# Altium PCB USB Isolator Board.PcbDoc
Units mm, origin at the board's own origin, x right, y up, seen from the top; angles counter-clockwise.
Board outline 49.5 x 27.5 mm, 2 copper layers (Top Layer, Bottom Layer), stack 0.872 mm thick; 32 components, 18 nets, 92 pads, 53 vias.
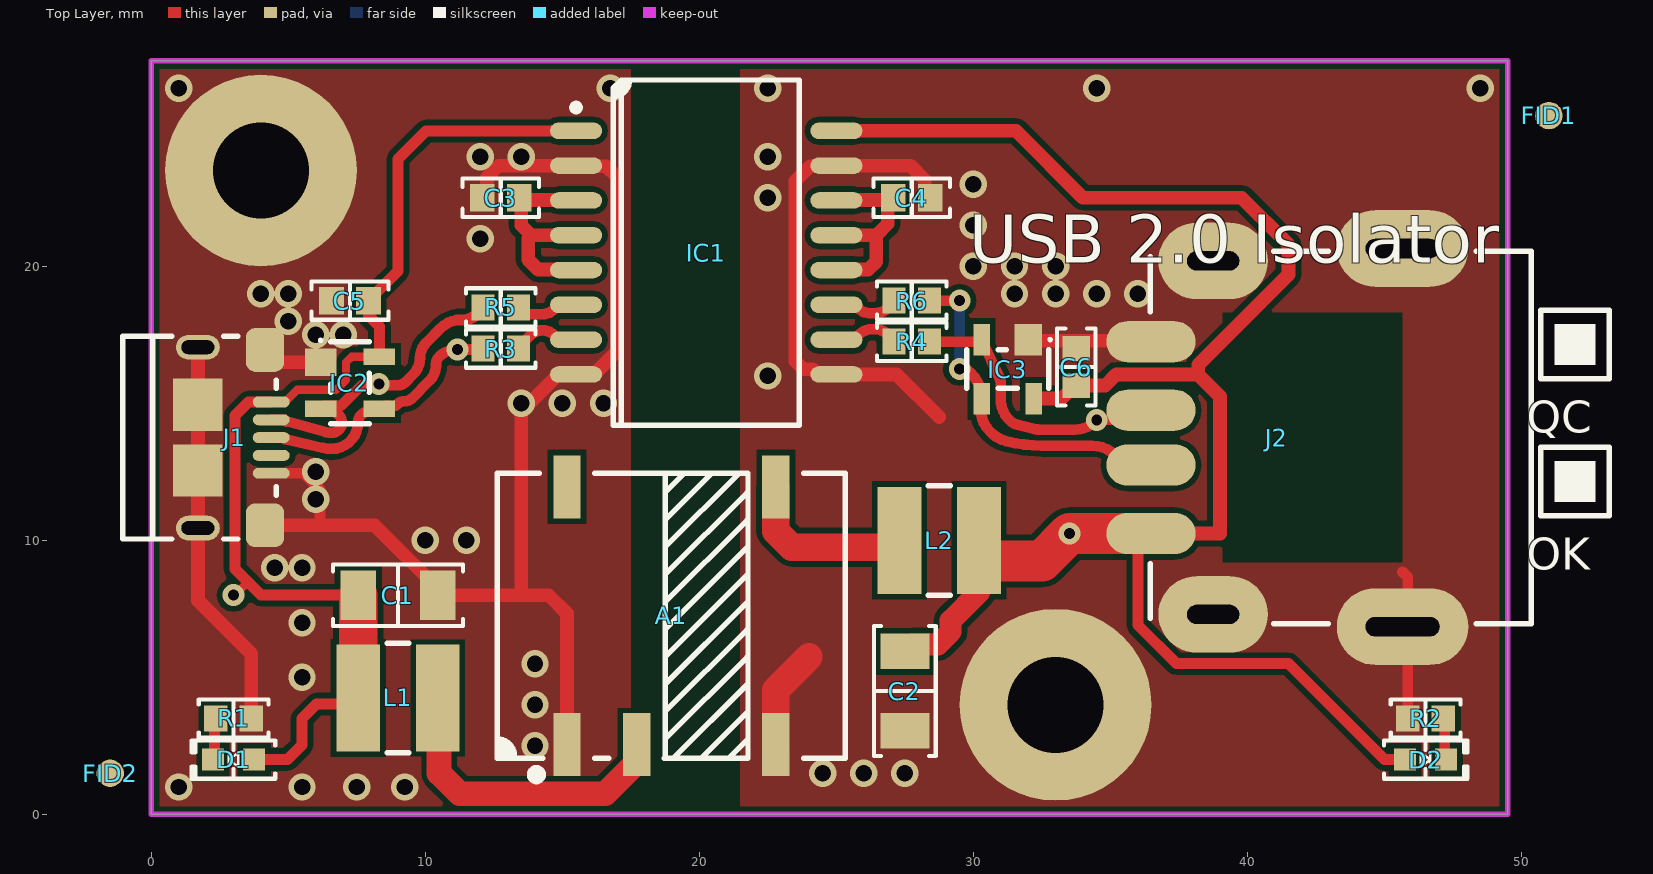
[diagram p0: Top Layer view]
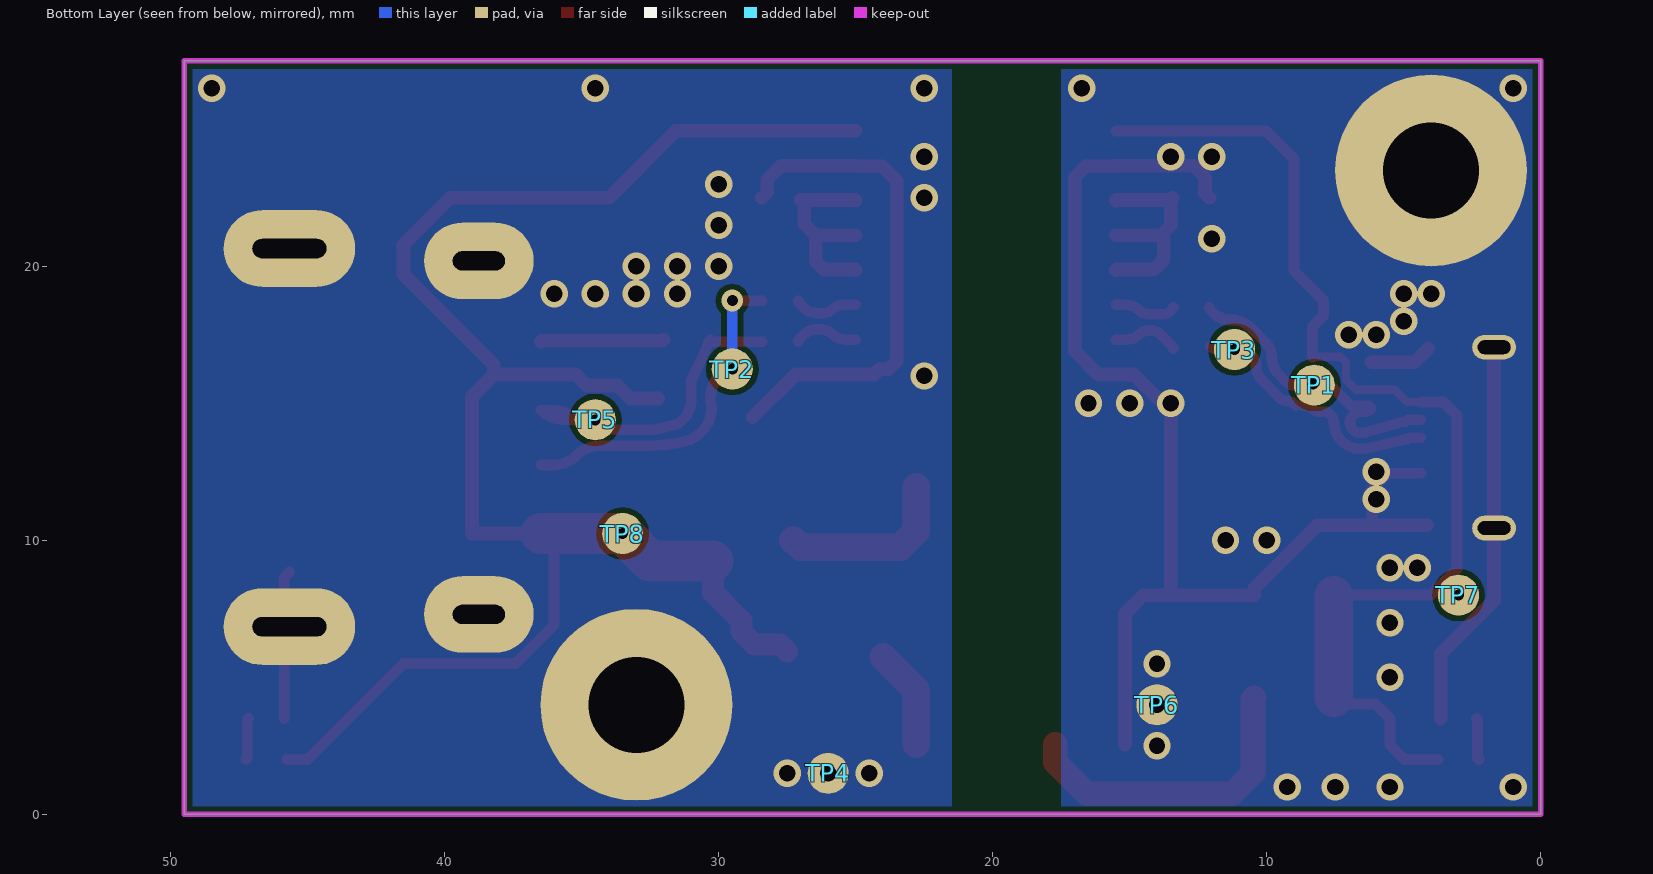
[diagram p1: Bottom Layer view, seen from below]
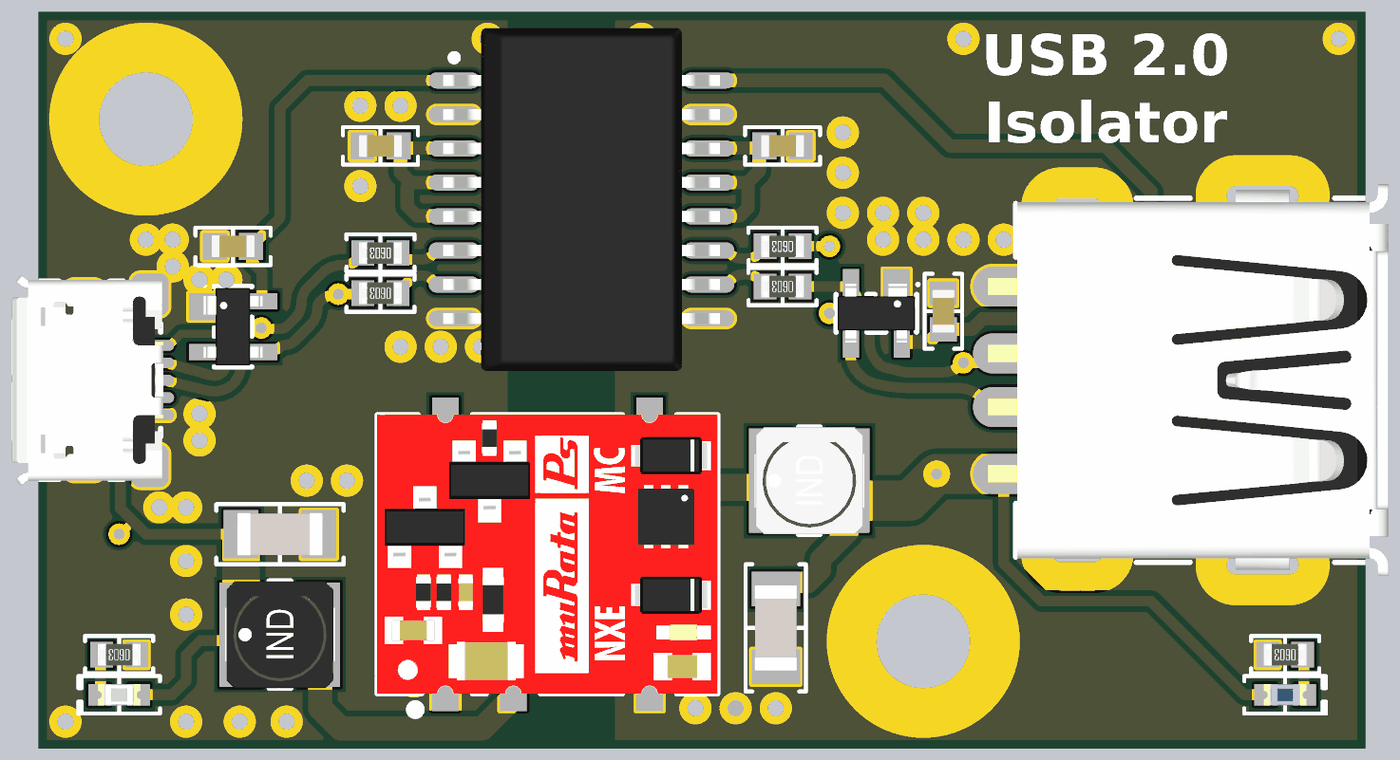
[diagram p2: 3D render of the assembled board from above, using the file's embedded part models]

## Layer stack, top to bottom
Top Solder: solder mask 0.01, Solder Resist, Dk 3.5
Top Layer: signal copper 0.036
Dielectric1: core 0.8, FR-4, Dk 4.8
Bottom Layer: signal copper 0.036
Bottom Solder: solder mask 0.01, Solder Resist, Dk 3.5

## Board outline
0,0 0,27.5 49.5,27.5 49.5,0

## Design rules (kind name [scope] priority, off if disabled: settings)
Clearance [InNet('GND1') vs InNet('GND2')] p1: gap=2.5 ignorepadtopadclearanceinfootprint=FALSE
Clearance Clearance_1 [All] p2: gap=0.2 ignorepadtopadclearanceinfootprint=FALSE
Clearance PadClearance [IsPad vs IsPad] p3: gap=0.2 ignorepadtopadclearanceinfootprint=FALSE except(0: Arc-Hole Track-Hole SMDPad-Hole THPad-Hole Via-Hole Fill-Hole Poly-Hole Region-Hole Text-Hole)
Creepage [InNet('GND1') vs InNet('GND2')] p1: checkdistance=2.5
DiffPairsRouting [InDifferentialPairClass('All Differential Pairs')] p1: maxlimit=0.3 minlimit=0.2 mostfreqgap=0.2 toplayer_minwidth=0.386 toplayer_maxwidth=0.599 toplayer_prefwidth=0.599 bottomlayer_minwidth=0.386 bottomlayer_maxwidth=0.599 bottomlayer_prefwidth=0.599 impedanceprofiledriven=TRUE impedanceprofileid={BF3D01C9-B830-4F7D-A954-FE7BFAC39876} impedanceprofilevalue=90.000000 maxuncoupledlength=12.7
HoleSize [All] p1: absolutevalues=TRUE maxlimit=6 minlimit=0.4 maxpercent=80.000 minpercent=20.000
HoleToHoleClearance [All] p1: gap=0.2 allowstackedmicrovias=TRUE
MinimumSolderMaskSliver [All] p1: minsoldermaskwidth=0
PolygonConnect ViaConnect [IsVia] p1: connectstyle=Direct reliefconductorwidth=0.254 reliefentries=4 polygonreliefangle="90 Angle" airgapwidth=0.254
PolygonConnect [All] p2: connectstyle=Direct reliefconductorwidth=0.3 reliefentries=4 polygonreliefangle="90 Angle" airgapwidth=0.254
RoutingVias [All] p1: holewidth=0.6 width=1 viastyle="Through Hole" minholewidth=0.4 minwidth=0.8 maxholewidth=5 maxwidth=6
SilkToSilkClearance [All] p1: silktosilkclearance=0
SilkToSolderMaskClearance SilkscreenOverComponentPads [IsPad] p1: minsilkscreentomaskgap=0.05 clearancetoexposedcopper=TRUE
SolderMaskExpansion "Via Tenting" [IsVia] p1: expansion=-2 istentingtop=FALSE
SolderMaskExpansion [All] p2: expansion=0.102 istentingtop=FALSE
Width [All] p1: maxlimit=2 minlimit=0.2 preferedwidth=0.4
24 further rules are at their usual default settings.

## Classes and differential pairs
differential pair DOUT: +DOUT_P -DOUT_N
differential pair DOT: +DOT_P -DOT_N
differential pair DIT: +DIT_P -DIT_N
differential pair DIN: +DIN_P -DIN_N

## Components (designator, comment, footprint, x,y, rotation, side; value= is the part's Value field where it differs from the comment)
A1 "NXE2S0505MC-R7" "MURATA NXE" 20.25,7.25 r0 top
C1 "4.7µF" "CAP 1206_3216 - 1.8MM" 9,8 r0 top
C2 "10µF" "CAP 1206_3216 - 1.8MM" 27.5,4.5 r270 top
C3 "0.1µF" "CAP 0603_1608" 12.75,22.5 r0 top
C4 "0.1µF" "CAP 0603_1608" 27.75,22.5 r180 top
C5 "1µF" "CAP 0603_1608" 7.25,18.75 r180 top
C6 "1µF" "CAP 0603_1608" 33.75,16.325 r90 top
D1 "Green" "LED 0603_1608 GREEN" 3,2 r180 top
D2 "Blue" "LED 0603_1608 BLUE" 46.5,2 r0 top
FID1 "Fiducial" Fiducial-1mm 51,25.5 r90 top
FID2 "Fiducial" Fiducial-1mm -1.5,1.5 r90 top
IC1 "ADUM4160BRIZ-RL" "ANALOG DEV SOIC-16 RI-16-1" 20.25,20.5 r0 top
IC2 "PRTR5V0U2X,215" SOT143B 7.25,15.75 r0 top
IC3 "PRTR5V0U2X,215" SOT143B 31.25,16.25 r270 top
J1 "10118193-0001LF" "FCI USB 10118193-0001LF" 1.75,13.75 r90 top
J2 "1932638-3" "TE 1932638-3 USB2.0A" 38.75,13.75 r90 top
L1 "15µH" "TDK VLCF4028-2" 9,4.25 r0 top
L2 "22µH" "TDK VLCF4024-2" 28.75,10 r0 top
R1 "680 Ohms" "RES 0603_1608" 3,3.5 r180 top
R2 "390 Ohms" "RES 0603_1608" 46.5,3.5 r180 top
R3 "24 Ohms" "RES 0603_1608" 12.75,17 r180 top
R4 "24 Ohms" "RES 0603_1608" 27.75,17.25 r180 top
R5 "24 Ohms" "RES 0603_1608" 12.75,18.5 r180 top
R6 "24 Ohms" "RES 0603_1608" 27.75,18.75 r180 top
TP1 "Test Point" TestPoint-1.5mm 8.26,15.664 r0 bottom
TP2 "Test Point" TestPoint-1.5mm 29.5,16.25 r270 bottom
TP3 "Test Point" TestPoint-1.5mm 11.176,16.965 r270 bottom
TP4 "Test Point" TestPoint-1.5mm 26,1.5 r270 bottom
TP5 "Test Point" TestPoint-1.5mm 34.5,14.4 r270 bottom
TP6 "Test Point" TestPoint-1.5mm 14,4 r270 bottom
TP7 "Test Point" TestPoint-1.5mm 3,8 r270 bottom
TP8 "Test Point" TestPoint-1.5mm 33.5,10.25 r270 bottom

## Footprints (in the part's own frame and the unit in brackets; to place one, negate y for a bottom-side part, rotate by r counter-clockwise, add the part's x,y. Pads: shape width x height; smd on the part's side, far side on the other; paste and mask are expansions set on the pad)
"ANALOG DEV SOIC-16 RI-16-1" [mm] "SOIC, 16-Leads, Body 12.80x7.50mm, Pitch 1.27mm, IPC Medium Density"
  oval 1.9x0.6 smd: 1(-4.75,4.445) 2(-4.75,3.175) 3(-4.75,1.905) 4(-4.75,0.635) 5(-4.75,-0.635) 6(-4.75,-1.905) 7(-4.75,-3.175) 8(-4.75,-4.445) 9(4.75,-4.445) 10(4.75,-3.175) 11(4.75,-1.905) 12(4.75,-0.635) 13(4.75,0.635) 14(4.75,1.905) 15(4.75,3.175) 16(4.75,4.445)
  silkscreen extent -4.87,-6.3 3.4,6.3, body extent -5.16,-6.4 5.16,6.4, height 2.65
"CAP 0603_1608" [mm] "Chip Capacitor, 2-Leads, Body 1.60x0.80mm, IPC Medium Density"
  rect 0.9x1 smd: 1(-0.675,0) 2(0.675,0)
  silkscreen extent -1.4,-0.7 1.4,0.7, body extent -0.8,-0.41 0.8,0.41, height 0.82
"CAP 1206_3216 - 1.8MM" [mm] "Chip Capacitor, 2-Leads, Body 3.25x1.60mm, IPC Medium Density"
  rect 1.3x1.8 smd: 1(-1.45,0) 2(1.45,0)
  silkscreen extent -2.37,-1.12 2.37,1.12, body extent -1.6,-0.8 1.6,0.8, height 1.8
"FCI USB 10118193-0001LF" [mm] "USB 2.0 Type B Micro"
  oval 0.4x1.35 smd: 1(1.3,-2.625) 2(0.65,-2.625) 3(0,-2.625) 4(-0.65,-2.625) 5(-1.3,-2.625)
  oval 0.9x1.6 hole 0.5 slot 1.2 at 90 deg: S(-3.3,0.05) S(3.3,0.05)
  rrect50% 1.6x1.4 smd: S(-3.2,-2.4) S(3.2,-2.4)
  rect 1.9x1.8 smd: S(-1.2,0.05) S(1.2,0.05)
  silkscreen extent -3.7,-2.8 3.7,2.8, body extent -3.93,-2.9 3.93,2.76, height 2.78
Fiducial-1mm [mm]
  round 1 smd paste-1 mask+0.5: F(0,0)
  Top Layer pour cut-out: -1,0 -0.924,0.383 -0.707,0.707 -0.383,0.924 0,1 0,1 0.383,0.924 0.707,0.707 0.924,0.383 1,0 1,0 0.924,-0.383 0.707,-0.707 0.383,-0.924 0,-1 0,-1 -0.383,-0.924 -0.707,-0.707 -0.924,-0.383 -1,0
  Top Layer pour cut-out: 0,0
"LED 0603_1608 BLUE" [mm] "Chip Diode, 2-Leads, Body 1.60x0.80mm, IPC Medium Density"
  rect 0.8x0.8 smd: 1(-0.75,0) 2(0.75,0)
  silkscreen extent -1.52,-0.7 1.52,0.7, body extent -0.8,-0.4 0.8,0.4, height 0.53
"LED 0603_1608 GREEN" [mm] "Chip Diode, 2-Leads, Body 1.60x0.80mm, IPC Medium Density"
  rect 0.8x0.8 smd: 1(-0.75,0) 2(0.75,0)
  silkscreen extent -1.52,-0.7 1.52,0.7, body extent -0.8,-0.4 0.8,0.4, height 0.53
"MURATA NXE" [mm]
  rect 1x2.3 smd: 1(-5.08,-4.7) 3(-2.54,-4.7) 7(2.54,-4.7) 8(2.54,4.7) 14(-5.08,4.7)
  silkscreen extent -7.62,-5.9 5.08,5.21, body extent -7.62,-5.21 5.08,5.21, height 4.48
"RES 0603_1608" [mm] "Chip Resistor, 2-Leads, Body 1.60x0.80mm, IPC Medium Density"
  rect 0.85x0.95 smd: 1(-0.65,0) 2(0.65,0)
  silkscreen extent -1.27,-0.7 1.27,0.7, body extent -0.8,-0.4 0.8,0.4, height 0.45
SOT143B [mm] "SOT143, 4-Leads, Body 2.90x2.30mm, Pitch 1.90mm, IPC Medium Density"
  rect 1.15x1 smd: 1(-1.075,0.75)
  rect 1.15x0.6 smd: 2(-1.075,-0.95) 3(1.075,-0.95) 4(1.075,0.95)
  silkscreen extent -1.12,-1.5 0.7,1.6, body extent -1.1,-1.45 1.1,1.45, height 1
"TDK VLCF4024-2" [mm] "Precision Wire Wound Inductor, 2-Leads, Body 4.00x4.00mm, IPC Medium Density"
  rect 1.6x3.9 smd: 1(-1.45,0) 2(1.45,0)
  silkscreen extent -0.4,-2 0.4,2, body extent -2.05,-2 2.05,2, height 2.4
"TDK VLCF4028-2" [mm] "Precision Wire Wound Inductor, 2-Leads, Body 4.00x4.00mm, IPC Medium Density"
  rect 1.6x3.9 smd: 1(-1.45,0) 2(1.45,0)
  silkscreen extent -0.4,-2 0.4,2, body extent -2.05,-2 2.05,2, height 2.81
"TE 1932638-3 USB2.0A" [mm] "USB 2.0 Type A RCP 4 POS Solder RA SMD 4 Terminal 1 Port T/R"
  oval 1.5x3.25 smd: 1(-3.5,2.27) 2(-1,2.27) 3(1,2.27) 4(3.5,2.27)
  oval 2.8x4.8 hole 0.7 slot 2.7 at 90 deg: S(-6.9,-6.91) S(6.9,-6.91)
  oval 2.8x4 hole 0.7 slot 1.9 at 90 deg: S(-6.45,0) S(6.45,0)
  Top Layer pour cut-out: -4.55,-0.35 -4.55,-6.9 4.55,-6.9 4.55,-0.35
  silkscreen extent -6.8,-11.6 6.8,2.3, body extent -7.32,-11.6 7.32,3.34, height 7.64
TestPoint-1.5mm [mm]
  round 1.5 smd: 1(0,0)

## Part data
A1: "DC DC CONVERTER 5V 2W", Current - Output (Max)=400mA, Device Package="14-SMD Module, 5 Leads", Manufacturer="Murata Power Solutions Inc.", Operating Temperature="-40°C ~ 85°C", Power (Watts)=2W, Supplier Part Number 1=811-3182-2-ND, Voltage - Input (Max)=5.5V, Voltage - Input (Min)=4.5V, Voltage - Isolation=3kV, Voltage - Output 1=5V, Applications="ITE (Commercial)", ComponentLink1Description=Datasheet, ComponentLink1URL=https://power.murata.com/data/power/ncl/kdc_nxe2.pdf, ComponentLink2Description="DigiKey Link", ComponentLink2URL=//digikey.com/product-detail/en/murata-power-solutions-inc/NXE2S0505MC-R7/811-3182-2-ND/6009739, Efficiency=72%, Features=SCP, LastUpdated="04/12/2019 23:42:39", Lifecycle Status=0, Minimum Order=1, Mounting Type="Surface Mount", Number of Outputs=1, Package / Case="14-SMD Module, 5 Leads", Packaging=TapeAndReel, Part Number=NXE2S0505MC-R7, Part Status=Active, PartId=2, Price=3.83, Series="NXE2 (2W)", Size / Dimension="0.50\" L x 0.40\" W x 0.17\" H (12.7mm x 10.4mm x 4.4mm)", Supplier 1=DigiKey, Type="Isolated Module"
C1: library part CL31B475KOHNNNE, "CAP CER 4.7UF 16V X7R 1206", Device Package="1206 (3216 Metric)", Manufacturer="Samsung Electro-Mechanics", Operating Temperature="-55°C ~ 125°C", Supplier Part Number 1=1276-3182-2-ND, Temperature Coefficient=X7R, Tolerance=±10%, Voltage - Rated=16V, Applications="General Purpose", Capacitance=4.7µF, ComponentLink1Description=Datasheet, ComponentLink1URL=http://www.samsungsem.com/kr/support/product-search/mlcc/CL31B475KOHNNNE.jsp, ComponentLink2Description="DigiKey Link", ComponentLink2URL=//digikey.com/product-detail/en/samsung-electro-mechanics/CL31B475KOHNNNE/1276-3182-2-ND/3888840, LastUpdated="29/11/2019 21:36:24", Lifecycle Status=0, Minimum Order=1, Mounting Type="Surface Mount, MLCC", Package / Case="1206 (3216 Metric)", Packaging=TapeAndReel, Part Number=CL31B475KOHNNNE, Part Status=Active, PartId=22712, Price=0.05, Series=CL, Size / Dimension="0.126\" L x 0.063\" W (3.20mm x 1.60mm)", Supplier 1=DigiKey, Thickness (Max)="0.071\" (1.80mm)"
C2: library part CL31B106MOHNNNE, "CAP CER 10UF 16V X7R 1206", Device Package="1206 (3216 Metric)", Manufacturer="Samsung Electro-Mechanics", Operating Temperature="-55°C ~ 125°C", Supplier Part Number 1=1276-6641-2-ND, Temperature Coefficient=X7R, Tolerance=±20%, Voltage - Rated=16V, Applications="General Purpose", Capacitance=10µF, ComponentLink1Description=Datasheet, ComponentLink1URL=http://www.samsungsem.com/kr/support/product-search/mlcc/CL31B106MOHNNNE.jsp, ComponentLink2Description="DigiKey Link", ComponentLink2URL=//digikey.com/product-detail/en/samsung-electro-mechanics/CL31B106MOHNNNE/1276-6641-2-ND/5961125, LastUpdated="29/11/2019 21:36:18", Lifecycle Status=0, Minimum Order=1, Mounting Type="Surface Mount, MLCC", Package / Case="1206 (3216 Metric)", Packaging=TapeAndReel, Part Number=CL31B106MOHNNNE, Part Status=Active, PartId=21983, Price=0.04, Series=CL, Size / Dimension="0.126\" L x 0.063\" W (3.20mm x 1.60mm)", Supplier 1=DigiKey, Thickness (Max)="0.071\" (1.80mm)"
C3 C4: library part CL10B104KB8NNNL, "CAP CER 0.1UF 50V X7R 0603", Device Package="0603 (1608 Metric)", Manufacturer="Samsung Electro-Mechanics", Operating Temperature="-55°C ~ 125°C", Supplier Part Number 1=1276-CL10B104KB8NNNLTR-ND, Temperature Coefficient=X7R, Tolerance=±10%, Voltage - Rated=50V, Applications="General Purpose", Capacitance=0.1µF, ComponentLink1Description=Datasheet, ComponentLink1URL=http://www.samsungsem.com/kr/support/product-search/mlcc/CL10B104KB8NNNL.jsp, ComponentLink2Description="DigiKey Link", ComponentLink2URL=//digikey.com/product-detail/en/samsung-electro-mechanics/CL10B104KB8NNNL/1276-CL10B104KB8NNNLTR-ND/3894274, LastUpdated="29/11/2019 20:59:46", Lifecycle Status=0, Minimum Order=1, Mounting Type="Surface Mount, MLCC", Package / Case="0603 (1608 Metric)", Packaging=TapeAndReel, Part Number=CL10B104KB8NNNL, Part Status=Active, PartId=3517, Price=0.00, Series=CL, Size / Dimension="0.063\" L x 0.031\" W (1.60mm x 0.80mm)", Supplier 1=DigiKey, Thickness (Max)="0.035\" (0.90mm)"
C5 C6: library part CC0603KRX5R8BB105, "CAP CER 1UF 25V X5R 0603", Device Package="0603 (1608 Metric)", Manufacturer=Yageo, Operating Temperature="-55°C ~ 85°C", Supplier Part Number 1=311-1445-2-ND, Temperature Coefficient=X5R, Tolerance=±10%, Voltage - Rated=25V, Applications="General Purpose", Capacitance=1µF, ComponentLink1Description=Datasheet, ComponentLink1URL=https://www.yageo.com/upload/media/product/productsearch/datasheet/mlcc/UPY-GPHC_X5R_4V-to-50V_25.pdf, ComponentLink2Description="DigiKey Link", ComponentLink2URL=//digikey.com/product-detail/en/yageo/CC0603KRX5R8BB105/311-1445-2-ND/2833610, LastUpdated="29/11/2019 20:59:49", Lifecycle Status=0, Minimum Order=1, Mounting Type="Surface Mount, MLCC", Package / Case="0603 (1608 Metric)", Packaging=TapeAndReel, Part Number=CC0603KRX5R8BB105, Part Status=Active, PartId=5146, Price=0.01, Series=CC, Size / Dimension="0.063\" L x 0.031\" W (1.60mm x 0.80mm)", Supplier 1=DigiKey, Thickness (Max)="0.035\" (0.90mm)"
D1: library part LTST-C191KGKT, "LED GREEN CLEAR SMD", Current - Test=20mA, Device Package="0603 (1608 Metric)", Lens Color=Colorless, Manufacturer="Lite-On Inc.", Millicandela Rating=35mcd, Supplier Part Number 1=160-1446-2-ND, Voltage - Forward (Vf) (Typ)=2V, Color=Green, ComponentLink1Description=Datasheet, ComponentLink1URL=http://optoelectronics.liteon.com/upload/download/DS22-2000-228/LTST-C191KGKT.PDF, ComponentLink2Description="DigiKey Link", ComponentLink2URL=//digikey.com/product-detail/en/lite-on-inc/LTST-C191KGKT/160-1446-2-ND/386835, Configuration=Standard, Height (Max)=0.65mm, LastUpdated="01/12/2019 14:50:11", Lens Size="1.10mm x 0.80mm", Lens Style="Rectangle with Flat Top", Lens Transparency=Clear, Lifecycle Status=0, Minimum Order=1, Mounting Type="Surface Mount", Package / Case="0603 (1608 Metric)", Packaging=TapeAndReel, Part Number=LTST-C191KGKT, Part Status=Active, PartId=655, Price=0.04, Series=-, Size / Dimension="1.60mm L x 0.80mm W", Supplier 1=DigiKey, Viewing Angle=130°, Wavelength - Dominant=571nm, Wavelength - Peak=574nm
D2: library part LTST-C194TBKT, "LED BLUE CLEAR SMD", Current - Test=20mA, Device Package="0603 (1608 Metric)", Lens Color=Colorless, Manufacturer="Lite-On Inc.", Millicandela Rating=104mcd, Supplier Part Number 1=160-1837-2-ND, Voltage - Forward (Vf) (Typ)=3.3V, Color=Blue, ComponentLink1Description=Datasheet, ComponentLink1URL=http://optoelectronics.liteon.com/upload/download/DS22-2010-0025/LTST-C194TBKT.PDF, ComponentLink2Description="DigiKey Link", ComponentLink2URL=//digikey.com/product-detail/en/lite-on-inc/LTST-C194TBKT/160-1837-2-ND/2356225, Configuration=Standard, Height (Max)=0.45mm, LastUpdated="01/12/2019 14:50:37", Lens Size="1.15mm x 0.80mm", Lens Style="Rectangle with Flat Top", Lens Transparency=Clear, Lifecycle Status=0, Minimum Order=1, Mounting Type="Surface Mount", Package / Case="0603 (1608 Metric)", Packaging=TapeAndReel, Part Number=LTST-C194TBKT, Part Status=Active, PartId=828, Price=0.06, Series=-, Size / Dimension="1.60mm L x 0.80mm W", Supplier 1=DigiKey, Viewing Angle=130°, Wavelength - Dominant=468nm, Wavelength - Peak=468nm
IC1: "DGTL ISOLATOR 5KV 2CH USB 16SOIC", Device Package="16-SOIC (0.295\", 7.50mm Width)", Isolated Power=No, Manufacturer="Analog Devices Inc.", Operating Temperature="-40°C ~ 105°C", Supplier Device Package=16-SOIC-IC, Supplier Part Number 1=ADUM4160BRIZ-RLTR-ND, Voltage - Isolation=5000Vrms, Voltage - Supply="3.1V ~ 5.5V", Channel Type=Bidirectional, Common Mode Transient Immunity (Min)=25kV/µs, ComponentLink1Description=Datasheet, ComponentLink1URL=https://www.analog.com/media/en/technical-documentation/data-sheets/ADuM4160.pdf, ComponentLink2Description="DigiKey Link", ComponentLink2URL=//digikey.com/product-detail/en/analog-devices-inc/ADUM4160BRIZ-RL/ADUM4160BRIZ-RLTR-ND/2700137, Data Rate=12Mbps, Inputs - Side 1/Side 2=2/2, LastUpdated="09/12/2019 20:48:06", Lifecycle Status=0, Minimum Order=1, Mounting Type="Surface Mount", Number of Channels=2, Package / Case="16-SOIC (0.295\", 7.50mm Width)", Packaging=TapeAndReel, Part Number=ADUM4160BRIZ-RL, Part Status=Active, PartId=48, Price=6.80, Propagation Delay tpLH / tpHL (Max)="70ns, 70ns", Rise / Fall Time (Typ)="20ns, 20ns (Max)", Series=iCoupler®, Supplier 1=DigiKey, Technology="Magnetic Coupling", Type=USB
IC2 IC3: "TVS DIODE 5.5V SOT143B", Capacitance @ Frequency="1pF @ 1MHz", Device Package="TO-253-4, TO-253AA", Manufacturer="Nexperia USA Inc.", Operating Temperature="-40°C ~ 85°C (TA)", Power Line Protection=Yes, Supplier Device Package=SOT-143B, Supplier Part Number 1=1727-3884-2-ND, Voltage - Breakdown (Min)=6V, Voltage - Reverse Standoff (Typ)="5.5V (Max)", Applications="General Purpose", ComponentLink1Description=Datasheet, ComponentLink1URL=https://assets.nexperia.com/documents/data-sheet/PRTR5V0U2X.pdf, ComponentLink2Description="DigiKey Link", ComponentLink2URL=//digikey.com/product-detail/en/nexperia-usa-inc/PRTR5V0U2X215/1727-3884-2-ND/1163690, LastUpdated="09/12/2019 21:29:05", Lifecycle Status=0, Minimum Order=1, Mounting Type="Surface Mount", Package / Case="TO-253-4, TO-253AA", Packaging=TapeAndReel, Part Number=PRTR5V0U2X,215, Part Status=Active, PartId=5451, Price=0.18, Series=-, Supplier 1=DigiKey, Type="Steering (Rail to Rail)", Unidirectional Channels=2
J1: "CONN RCPT USB2.0 MICRO B SMD R/A", Current Rating (Amps)="1.8A per Contact", Manufacturer="Amphenol ICC (FCI)", Operating Temperature="-30°C ~ 80°C", Supplier Part Number 1=609-4616-2-ND, Voltage - Rated=100VAC, ComponentLink1Description=Datasheet, ComponentLink1URL=https://cdn.amphenol-icc.com/media/wysiwyg/files/documentation/datasheet/inputoutput/io_usb_micro.pdf, ComponentLink2Description="DigiKey Link", ComponentLink2URL=//digikey.com/product-detail/en/amphenol-icc-fci/10118193-0001LF/609-4616-2-ND/2785388, Connector Type="USB - micro B", Features="Solder Retention", Gender=Receptacle, LastUpdated="09/12/2019 20:51:28", Lifecycle Status=0, Mating Cycles=10000, Minimum Order=1, Mounting Feature=Horizontal, Mounting Type="Surface Mount, Right Angle; Through Hole", Number of Contacts=5, Number of Ports=1, Packaging=TapeAndReel, Part Number=10118193-0001LF, Part Status=Active, Price=0.21, Series=-, Shielding=Shielded, Specifications="USB 2.0", Supplier 1=DigiKey, Termination=Solder
J2: "CONN RCPT USB2.0 TYPEA 4P SMD RA", Current Rating (Amps)="1A per Contact", Manufacturer="TE Connectivity AMP Connectors", Operating Temperature="-55°C ~ 85°C", Supplier Part Number 1=A117902TR-ND, Voltage - Rated=30VAC, ComponentLink1Description=Datasheet, ComponentLink1URL=https://www.te.com/commerce/DocumentDelivery/DDEController?Action=srchrtrv&DocNm=501-60007-1&DocType=SS&DocLang=EN, ComponentLink2Description="DigiKey Link", ComponentLink2URL=//digikey.com/product-detail/en/te-connectivity-amp-connectors/1932638-3/A117902TR-ND/4731612, Connector Type="USB - A", Features="Solder Retention", Gender=Receptacle, LastUpdated="09/12/2019 20:47:08", Lifecycle Status=0, Mating Cycles=1500, Minimum Order=1, Mounting Feature=Horizontal, Mounting Type="Surface Mount, Right Angle", Number of Contacts=4, Number of Ports=1, Packaging=TapeAndReel, Part Number=1932638-3, Part Status=Active, Price=0.97, Series=-, Shielding=Shielded, Specifications="USB 2.0", Supplier 1=DigiKey, Termination=Solder
L1: library part VLCF4028T-150MR88-2, "FIXED IND 15UH 880MA 170 MOHM", Current - Saturation=880mA, DC Resistance (DCR)="170mOhm Max", Device Package=Nonstandard, Inductance Frequency - Test=100kHz, Manufacturer="TDK Corporation", Operating Temperature="-40°C ~ 105°C", Supplier Part Number 1=445-6543-2-ND, Tolerance=±20%, ComponentLink1Description=Datasheet, ComponentLink1URL=https://product.tdk.com/info/en/catalog/datasheets/inductor_commercial_power_vlcf4028-2_en.pdf?ref_disty=digikey, ComponentLink2Description="DigiKey Link", ComponentLink2URL=//digikey.com/product-detail/en/tdk-corporation/VLCF4028T-150MR88-2/445-6543-2-ND/2465300, Current Rating (Amps)=880mA, Height - Seated (Max)="0.110\" (2.80mm)", Inductance=15µH, LastUpdated="02/12/2019 13:32:15", Lifecycle Status=0, Material - Core=Ferrite, Minimum Order=1, Mounting Type="Surface Mount", Package / Case=Nonstandard, Packaging=TapeAndReel, Part Number=VLCF4028T-150MR88-2, Part Status=Active, PartId=183, Price=0.44, Series=VLCF, Shielding=Shielded, Size / Dimension="0.157\" L x 0.157\" W (4.00mm x 4.00mm)", Supplier 1=DigiKey, Type=Wirewound
L2: library part VLCF4024T-220MR65-2, "FIXED IND 22UH 650MA 332 MOHM", Current - Saturation=650mA, DC Resistance (DCR)="332mOhm Max", Device Package=Nonstandard, Inductance Frequency - Test=100kHz, Manufacturer="TDK Corporation", Operating Temperature="-40°C ~ 105°C", Supplier Part Number 1=445-8732-2-ND, Tolerance=±20%, ComponentLink1Description=Datasheet, ComponentLink1URL=https://product.tdk.com/info/en/catalog/datasheets/inductor_commercial_power_vlcf4024-2_en.pdf?ref_disty=digikey, ComponentLink2Description="DigiKey Link", ComponentLink2URL=//digikey.com/product-detail/en/tdk-corporation/VLCF4024T-220MR65-2/445-8732-2-ND/3083283, Current Rating (Amps)=650mA, Height - Seated (Max)="0.094\" (2.40mm)", Inductance=22µH, LastUpdated="02/12/2019 13:29:53", Lifecycle Status=0, Material - Core=Ferrite, Minimum Order=1, Mounting Type="Surface Mount", Package / Case=Nonstandard, Packaging=TapeAndReel, Part Number=VLCF4024T-220MR65-2, Part Status=Active, PartId=165, Price=0.44, Series=VLCF, Shielding=Shielded, Size / Dimension="0.157\" L x 0.157\" W (4.00mm x 4.00mm)", Supplier 1=DigiKey, Type=Wirewound
R1: library part CR0603-JW-681ELF, "RES SMD 680 OHM 5% 1/10W 0603", Device Package="0603 (1608 Metric)", Manufacturer="Bourns Inc.", Operating Temperature="-55°C ~ 155°C", Power (Watts)="0.1W, 1/10W", Supplier Device Package=0603, Supplier Part Number 1=CR0603-JW-681ELFTR-ND, Temperature Coefficient=±200ppm/°C, Tolerance=±5%, ComponentLink1Description=Datasheet, ComponentLink1URL=https://www.bourns.com/docs/Product-Datasheets/CHPREZTR.pdf, ComponentLink2Description="DigiKey Link", ComponentLink2URL=//digikey.com/product-detail/en/bourns-inc/CR0603-JW-681ELF/CR0603-JW-681ELFTR-ND/3784416, Composition="Thick Film", Features="Moisture Resistant", Height - Seated (Max)="0.022\" (0.55mm)", LastUpdated="29/11/2019 21:00:44", Lifecycle Status=0, Minimum Order=1, Number of Terminations=2, Package / Case="0603 (1608 Metric)", Packaging=TapeAndReel, Part Number=CR0603-JW-681ELF, Part Status=Active, PartId=6073, Price=0.00, Resistance="680 Ohms", Series=CR0603, Size / Dimension="0.063\" L x 0.031\" W (1.60mm x 0.80mm)", Supplier 1=DigiKey
R2: library part CRCW0603390RFKEA, "RES SMD 390 OHM 1% 1/10W 0603", Device Package="0603 (1608 Metric)", Manufacturer="Vishay Dale", Operating Temperature="-55°C ~ 155°C", Power (Watts)="0.1W, 1/10W", Ratings=AEC-Q200, Supplier Device Package=0603, Supplier Part Number 1=541-390HTR-ND, Temperature Coefficient=±100ppm/°C, Tolerance=±1%, ComponentLink1Description=Datasheet, ComponentLink1URL=http://www.vishay.com/docs/20035/dcrcwe3.pdf, ComponentLink2Description="DigiKey Link", ComponentLink2URL=//digikey.com/product-detail/en/vishay-dale/CRCW0603390RFKEA/541-390HTR-ND/1174620, Composition="Thick Film", Features="Automotive AEC-Q200", Height - Seated (Max)="0.020\" (0.50mm)", LastUpdated="29/11/2019 21:00:48", Lifecycle Status=0, Minimum Order=1, Number of Terminations=2, Package / Case="0603 (1608 Metric)", Packaging=TapeAndReel, Part Number=CRCW0603390RFKEA, Part Status=Active, PartId=7821, Price=0.00, Resistance="390 Ohms", Series=CRCW, Size / Dimension="0.061\" L x 0.033\" W (1.55mm x 0.85mm)", Supplier 1=DigiKey
R3 R4 R5 R6: library part CRCW060324R0FKEA, "RES SMD 24 OHM 1% 1/10W 0603", Device Package="0603 (1608 Metric)", Manufacturer="Vishay Dale", Operating Temperature="-55°C ~ 155°C", Power (Watts)="0.1W, 1/10W", Ratings=AEC-Q200, Supplier Device Package=0603, Supplier Part Number 1=541-24.0HTR-ND, Temperature Coefficient=±100ppm/°C, Tolerance=±1%, ComponentLink1Description=Datasheet, ComponentLink1URL=http://www.vishay.com/docs/20035/dcrcwe3.pdf, ComponentLink2Description="DigiKey Link", ComponentLink2URL=//digikey.com/product-detail/en/vishay-dale/CRCW060324R0FKEA/541-24.0HTR-ND/1174481, Composition="Thick Film", Features="Automotive AEC-Q200", Height - Seated (Max)="0.020\" (0.50mm)", LastUpdated="29/11/2019 21:00:49", Lifecycle Status=0, Minimum Order=1, Number of Terminations=2, Package / Case="0603 (1608 Metric)", Packaging=TapeAndReel, Part Number=CRCW060324R0FKEA, Part Status=Active, PartId=7907, Price=0.00, Resistance="24 Ohms", Series=CRCW, Size / Dimension="0.061\" L x 0.033\" W (1.55mm x 0.85mm)", Supplier 1=DigiKey

## Free pads (board coordinates)
  round 7 hole 3.5: M(4,23.5) M(33,4)

## Via types
v1: diameter 1, hole 0.6, Top Layer to Bottom Layer, 46 vias
v2: diameter 0.8, hole 0.4, Top Layer to Bottom Layer, 7 vias

## Nets (pads, with @x,y where several pads share a name; then routed paths per layer and width w, separated by ;. In a path a pad name is that pad's centre, name@x,y a point inside that pad or via, vN(x,y) a via of type N, cw(c..) or ccw(c..) an arc to the next point about the centre after c; other vN are vias at no path point)
5VIN: C1.1 C5.1 D1.1 IC1.1 IC2.4 J1.1 L1.1 TP7.1 | length 41.6
  Top Layer w0.3: v2(3,8) 3.05,8 3.525,8.475 ; J1.1 4.877,15.05 5.32,15.493 6.738,15.493 7.1,15.855 7.1,16.5 7.3,16.7 IC2.4
  Top Layer w0.4: D1.1 4.973,2 5.5,2.527 5.5,3.5 6.027,4.027 7.327,4.027 L1.1 ; J1.1 3.55,15.05 3.05,14.55 3.05,8.95 3.525,8.475 4,8 C1.1 ; IC2.4 8.325,17.8 7.925,18.2 C5.1 9,19.825 9,23.923 10.022,24.945 IC1.1
  Top Layer w1.4: L1.1 C1.1
5VOUT: C2.1 C6.1 D2.1 IC1.16 IC3.4 J2.1 L2.2 TP8.1 | length 66.3
  Top Layer w0.4: J2.1 36,9.77 36,6.904 37.404,5.5 41.5,5.5 45,2 D2.1
  Top Layer w0.5: IC1.16 31.555,24.945 34,22.5 39.793,22.5 41.5,20.793 41.5,19.698 38.2,16.398 38.2,16.05 ; IC3.4 33.225,15.175 33.7,15.65 C6.1 34.808,15.65 35.208,16.05 38.2,16.05 ; J2.1 39,10.25 39,15.25 38.2,16.05
  Top Layer w0.8: C2.1 27.75,6.2 28.7,6.2 29.169,6.669 29.169,7.069 30.2,8.1 L2.2@30.2,9.25
  Top Layer w1.5: L2.2@30.2,9.25 32.5,9.25 v2(33.5,10.25) J2.1
DIN_N: IC2.2 J1.2 R5.2 TP1.1 | length 12.8
  Top Layer w0.386: J1.2 4.808,14.4 cw(c4.808,14.29) 4.886,14.368 ccw(c4.964,14.445) 4.964,14.336 4.982,14.336 6.364,13.95 ccw(c6.571,14.693) 6.573,13.921 ccw(c6.571,14.307) 6.844,14.034 ccw(c6.571,14.307) 6.957,14.307 ccw(c6.571,14.307) 6.844,14.58 ccw(c6.571,14.307) 6.571,14.693 6.434,14.693 cw(c6.434,15.059) IC2.2 6.282,14.907 6.92,14.907 7.677,15.664 8.843,15.664 9.003,15.664 ccw(c9.003,16.05) 9.276,15.777 9.562,16.063 ccw(c8.979,16.646) 9.799,16.557 ccw(c8.979,16.646) 9.804,16.646 cw(c10.629,16.646) 10.045,17.229 10.564,17.748 cw(c11.276,17.036) 11.126,18.032 cw(c11.276,17.036) 11.276,18.043 ; 11.129,18.035 cw(c11.149,18.015) 11.149,18.043 11.276,18.043 ; 11.276,18.043 ccw(c11.276,19.049) R5.2@11.988,18.338 ; 11.276,18.043 11.405,18.043 ccw(c11.405,18.738) 11.896,18.246 R5.2@11.988,18.338 ; R5.2@11.988,18.338 R5.2@12.065,18.415 ; R5.2@11.988,18.338 R5.2@12.065,18.415 ; R5.2@12.065,18.415 ccw(c11.979,18.5) R5.2 cw(c11.979,18.5) R5.2@12.065,18.415
  other v2: 8.3,15.7
DIN_P: IC2.3 J1.3 R3.2 TP3.1 | length 9.5
  Top Layer w0.386: J1.3 4.735,13.75 cw(c4.735,13.553) 4.874,13.692 cw(c4.85,13.1) 4.99,13.676 6.256,13.373 ccw(c6.571,14.693) 6.573,13.336 6.58,13.336 ccw(c6.571,14.307) 7.543,14.309 cw(c7.929,14.307) 7.654,14.579 7.656,14.58 cw(c7.929,14.307) 7.929,14.693 8.066,14.693 ccw(c8.066,15.059) IC2.3 cw(c8.584,14.541) 8.584,14.907 IC2.3@8.673,14.907 ; 8.916,14.907 8.974,14.966 cw(c9.246,14.693) 9.246,15.078 ccw(c9.246,15.463) 9.285,15.08 ccw(c9.246,15.463) 9.518,15.191 10.148,15.821 ccw(c9.565,16.404) 10.385,16.314 ; 10.39,16.404 cw(c9.565,16.404) 10.385,16.314 ; R3.2@12.065,17.085 cw(c11.774,17.376) 11.774,16.965 v2(11.176,16.965) 11.14,16.965 ccw(c11.14,16.06) 10.5,16.7 ccw(c10.778,16.422) 10.385,16.422 10.385,16.314
DIT_N: IC1.6 R5.1 | length 2.3
  Top Layer w0.386: R5.1 ccw(c13.436,18.5) R5.1@13.411,18.474 ; R5.1@13.411,18.474 13.516,18.369 ccw(c13.796,18.649) 13.796,18.253 14.275,18.253 ccw(c14.275,18.837) 14.688,18.424 cw(c15.101,18.011) 15.101,18.595 IC1.6
DIT_P: IC1.7 R3.1 | length 2.5
  Top Layer w0.386: R3.1 cw(c13.521,17) 13.435,17.085 13.835,17.485 cw(c14.275,17.045) 14.275,17.667 cw(c14.275,17.083) 14.688,17.496 ccw(c15.101,17.909) 15.101,17.325 IC1.7
DOT_N: IC1.11 R6.2 | length 2.4
  Top Layer w0.386: IC1.11 25.467,18.595 cw(c25.467,18.079) 25.832,18.444 ccw(c26.197,18.809) 26.197,18.293 26.405,18.293 ccw(c26.405,18.988) 26.896,18.496 27.065,18.665 ccw(c26.979,18.75) R6.2
DOT_P: IC1.10 R4.2 | length 2.4
  Top Layer w0.386: IC1.10 25.371,17.325 ccw(c25.371,17.977) 25.832,17.516 cw(c26.293,17.055) 26.293,17.707 26.405,17.707 cw(c26.405,17.012) 26.896,17.504 27.065,17.335 cw(c26.979,17.25) R4.2
DOUT_N: IC3.3 J2.2 R6.1 TP2.1 | length 12.6
  Top Layer w0.386: R6.1 v2(29.5,18.75) ; v2(29.5,16.25) 29.75,16.25 29.929,16.071 cw(c29.033,15.175) IC3.3 30.261,14.859 ccw(c30.643,14.811) 30.258,14.803 ccw(c31.509,14.833) 31.203,13.619 ccw(c32.507,18.783) 32.499,13.457 34.322,13.457 cw(c34.322,12.25) 35.175,13.104 ccw(c36.029,13.957) 36.029,12.75 J2.2
  Bottom Layer w0.386: v2(29.5,16.25) v2(29.5,18.75)
DOUT_P: IC3.2 J2.3 R4.1 TP5.1 | length 11.9
  Top Layer w0.386: R4.1 30.119,17.25 ccw(c30.119,17.506) IC3.2 cw(c30.041,17.066) 30.406,17.098 30.418,17.071 30.652,16.57 30.654,16.564 30.898,16.04 ccw(c31.248,16.203) 30.905,16.026 30.949,15.941 cw(c30.607,15.763) 30.993,15.763 30.993,15.341 30.993,15.089 ccw(c31.379,15.089) 30.997,15.035 ccw(c32.153,15.203) 31.384,14.323 ccw(c31.638,14.613) 31.544,14.239 32.26,14.058 ccw(c32.354,14.431) 32.338,14.046 ccw(c32.506,18.302) 32.498,14.043 33.7,14.043 ccw(c33.7,15.112) v2@34.456,14.356 ; v2(34.5,14.4) J2.3@35.179,14.4 ; J2.3@35.175,14.396 cw(c36.029,13.543) J2.3@35.179,14.4 ; J2.3@35.179,14.4 cw(c36.029,13.543) 36.029,14.75 J2.3 cw(c35.635,15.595) 35.635,14.4 J2.3@35.179,14.4
GND1: A1.1 C1.2 C3.1 C5.2 IC1.2 IC1.8 IC2.1 J1.5 J1.S pad.M@4,23.5 R1.1 TP6.1 | length 60.6
  Top Layer w0.4: J1.5 5.55,12.45 5.749,12.251 6.15,11.85 6.15,10.55
  Top Layer w0.5: J1.S@1.7,17.05 1.7,14.95 1.7,12.55 1.7,10.45 1.7,7.8 3.65,5.85 R1.1 ; J1.S@4.1,17 4.15,16.95 4.15,16.942 4.592,16.5 IC2.1 ; J1.S@4.15,10.55 6.15,10.55 8.15,10.55 10.45,8.25 C1.2 13.5,8 ; C3.1 12.25,22.675 12.25,23.25 12.675,23.675 IC1.2 15.519,23.656 16.594,23.656 17,23.25 17,16.905 16.15,16.055 IC1.8 14.85,16.055 13.5,14.705 13.5,8 ; A1.1 15.17,7.33 14.5,8 13.5,8
  other v1: 1,1 5.5,1 7.5,1 9.25,1 14,2.5 14,4 5.5,5 14,5.5 5.5,7 4.5,9 5.5,9 10,10 11.5,10 6,11.5 6,12.5 13.5,15 15,15 16.5,15 6,17.5 7,17.5 5,18 4,19 5,19 12,21 12,24 13.5,24 1,26.5 16.75,26.5
GND2: A1.7 C2.2 C4.1 C6.2 IC1.9 IC1.15 IC3.1 J2.4 J2.S pad.M@33,4 R2.2 TP4.1 | length 32.2
  Top Layer w0.4: 45.66,8.85 45.85,8.66 R2.2
  Top Layer w0.5: C4.1 28.225,22.7 28.225,23.157 27.707,23.675 IC1.15 24.981,23.656 24.043,23.656 23.5,23.113 23.5,16.543 23.793,16.25 24.128,16.25 24.323,16.055 IC1.9 27.195,16.055 28.75,14.5 ; IC3.1 32.038,17.287 36.443,17.287 J2.4
  Top Layer w1: A1.7 22.79,4.54 24,5.75
  other v1: 24.5,1.5 26,1.5 27.5,1.5 22.5,16 31.5,19 33,19 34.5,19 36,19 30,20 31.5,20 33,20 30,21.5 22.5,22.5 30,23 22.5,24 22.5,26.5 34.5,26.5 48.5,26.5
NetA1_3: A1.3 L1.2 | length 11.4
  Top Layer w0.9: L1.2 10.5,4.2 10.5,1.5 11.25,0.75 16.56,0.75 17.71,1.9 A1.3
NetA1_8: A1.8 L2.1 | length 6.5
  Top Layer w1: A1.8 22.79,10.336 23.376,9.75 27,9.75 27.25,10 L2.1
NetD1_2: D1.2 R1.2 | length 1.5
  Top Layer w0.4: D1.2 2.3,2.05 2.3,3.45 R1.2
NetD2_2: D2.2 R2.1 | length 1.5
  Top Layer w0.4: R2.1 47.2,3.45 47.2,2.05 D2.2
VDD1: C3.2 IC1.3 IC1.4 IC1.5 | length 8
  Top Layer w0.5: C3.2 13.5,22.425 13.5,21.5 13.865,21.135 ; C3.2@13.501,22.424 15.481,22.424 IC1.3 ; IC1.5 15.481,19.884 14.116,19.884 13.75,20.25 13.75,21.02 13.865,21.135 ; IC1.4 13.865,21.135
VDD2: C4.2 IC1.12 IC1.13 IC1.14 | length 7.5
  Top Layer w0.5: IC1.12 25.019,19.884 26.164,19.884 26.457,20.177 26.457,21.135 ; IC1.13 26.457,21.135 ; IC1.14 25.019,22.424 26.999,22.424 26.875,22.3 26.875,21.553 26.457,21.135
pads on no net: A1.14 FID1.F FID2.F J1.4

## Polygon pours and split planes (outlines as drawn)
GND2 on Top Layer "GND2_L01_P001" (solid, remove dead copper, pour order 1): 49.5,27.5 21.5,27.5 21.5,0 49.5,0
GND1 on Top Layer "GND1_L01_P000" (solid, remove dead copper, pour order 0): 0,27.5 17.5,27.5 17.5,0 0,0
GND1 on Bottom Layer "GND1_L02_P004" (solid, remove dead copper, pour order 4): 0,0 17.5,0 17.5,27.5 0,27.5
GND2 on Bottom Layer "GND2_L02_P003" (solid, remove dead copper, pour order 3): 49.5,0 21.5,0 21.5,27.5 49.5,27.5

## Keep-outs
Keep-Out Layer:
  the board outline again, w0.2

## Silkscreen, mask and mechanical layers (free items; w line width, h text height)
Top Overlay:
  rectangle: 51.2,11.4 52.7,12.9
  rectangle: 51.2,16.4 52.7,17.9
  lines w0.2: 50.7,10.9 53.2,10.9 53.2,13.4 50.7,13.4 50.7,10.9 ; 50.7,15.9 53.2,15.9 53.2,18.4 50.7,18.4 50.7,15.9
  text "USB 2.0 Isolator" at 29.856,19.539 h3
  text "QC" at 50.184,13.542 h2
  text "OK" at 50.184,8.542 h2
Outlines:
  the board outline again, w0.2
Milling:
  lines w2: -1,-1 50.5,-1 ; -1,28.5 50.5,28.5